# EAGLE board KäsiPCB v20 (EAGLE 9.7.0)
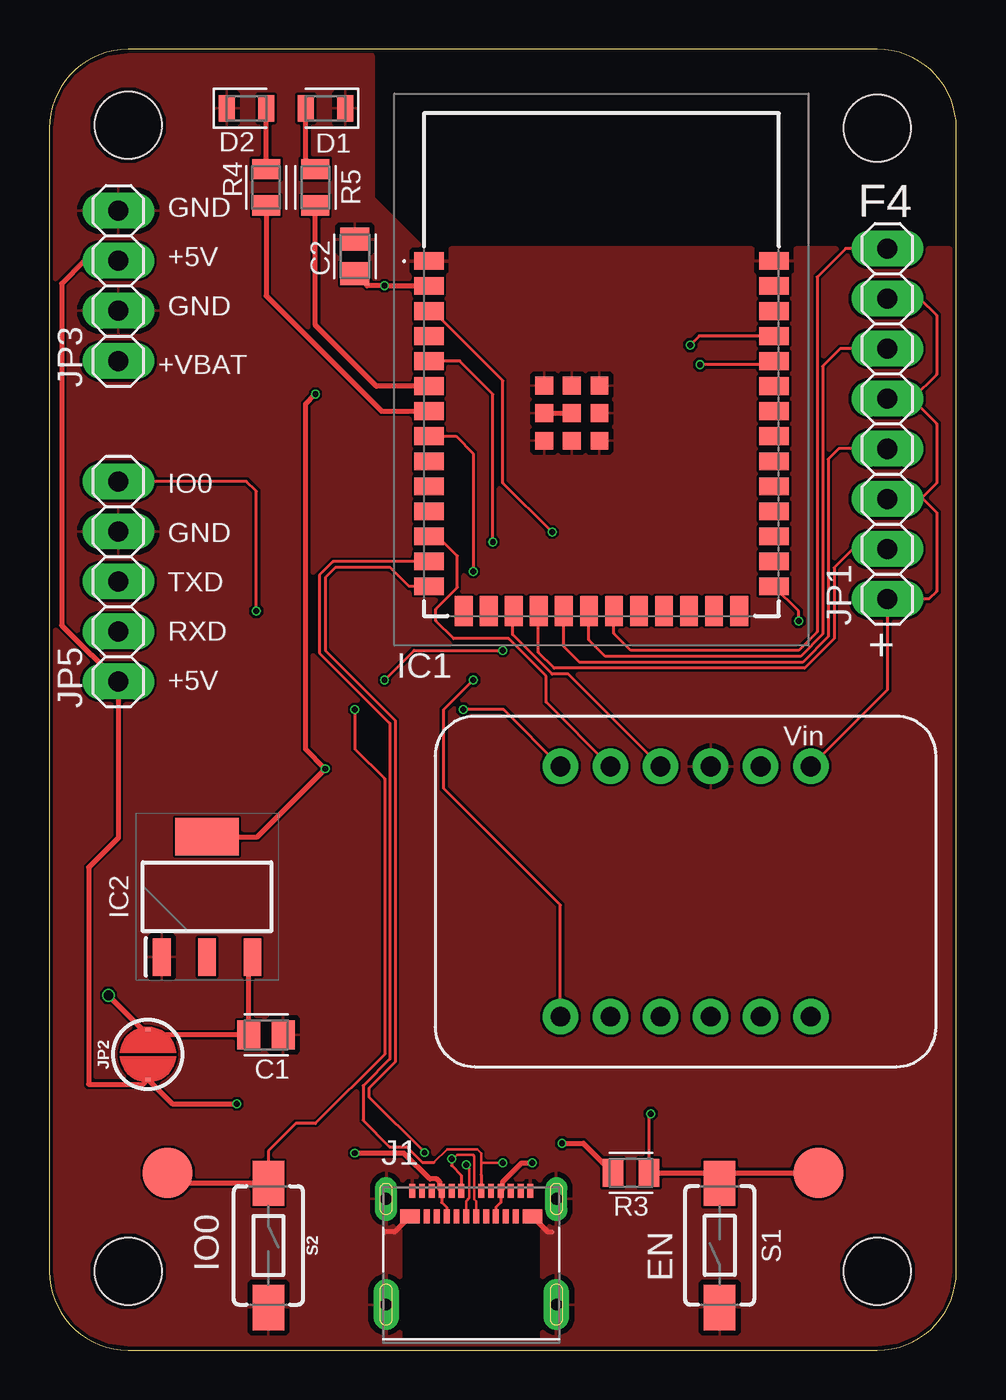
[diagram p0: board, top side]
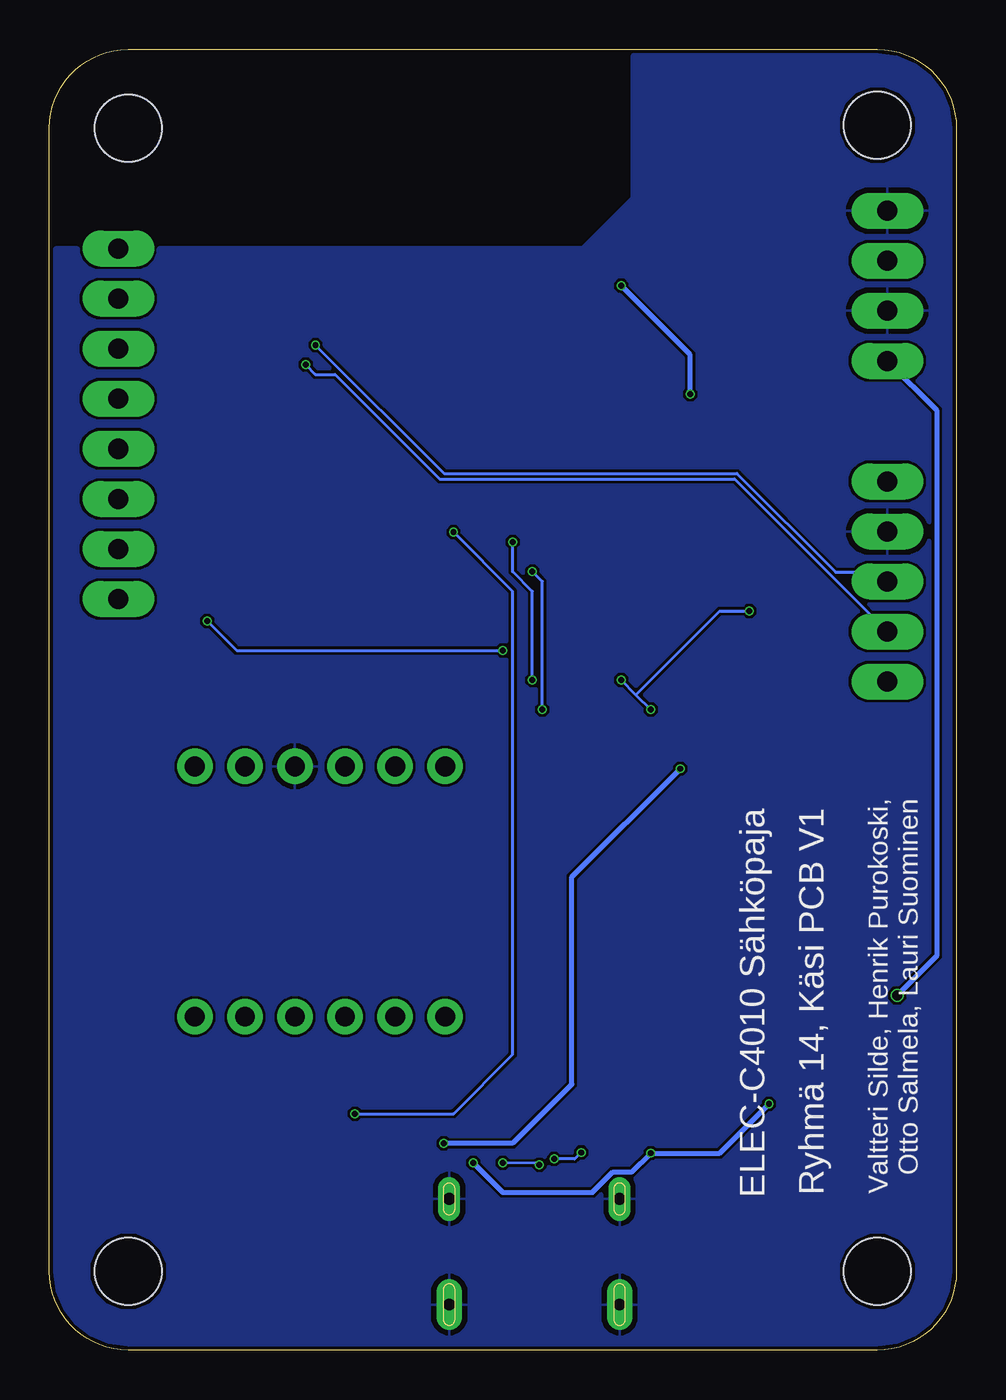
[diagram p1: board, bottom side, seen from below]

Size 46 x 66 mm. Coordinates in mm from the lower left corner, seen from the top.
Outline: 42,66 4,66 arc90 0,62 0,4 arc90 4,0 42,0 arc90 46,4 46,62 arc90 42,66
Copper layers (1*16): Top / Bottom
Stack-up Default Layer Stack: Top User Defined 0.035mm / Dielectric-1 User Defined 1.6mm / Bottom User Defined 0.035mm
Design rules: minimum copper width 5mil, minimum drill size 0.3mm, copper clearance wire_polygon to wire_polygon 5mil, copper clearance wire_polygon to pad_smd 5mil, copper clearance wire_polygon to via 5mil, copper clearance pad_smd to pad_smd 5mil, copper clearance pad_smd to via 5mil, copper clearance via to via 5mil, copper clearance smd to pad (same net) 5mil, copper clearance smd to via (same net) 5mil, copper clearance smd to smd (same net) 5mil, dimension clearance 0.2mm, restrict clearance 0mil, drill distance 6mil, keepout clearance 0mil
Holes 3.4 mm at 42,4 4,4 4,62.15 42,62

## Footprints (pad centres in the part's own frame; a part is rotated, then mirrored left to right if it is on the bottom)
ICM20948_BREADBOARD = drill 1 pad 1.676: P$1 -7.62,5.08; P$2 -5.08,5.08; P$3 -2.54,5.08; P$4 0,5.08; P$5 2.54,5.08; P$6 5.08,5.08; P$7 -7.62,-7.62; P$8 -5.08,-7.62; P$9 -2.54,-7.62; P$10 0,-7.62; P$11 2.54,-7.62; P$12 5.08,-7.62
CAPC2012X110 = smd 1.165 x 1.465: 1 -0.875,0; 2 0.875,0
LEDC2012X110N_B = smd 0.817 x 1.352: 1 -1,0 | smd 0.822 x 1.352: 2 0.998,0
LEDC2012X110N_R = smd 0.817 x 1.352: 1 -1,0 | smd 0.822 x 1.352: 2 0.998,0
ESP32S3WROOM1N16R2 = smd 1.5 x 0.9: 1 -8.75,5.26; 2 -8.75,3.99; 3 -8.75,2.72; 4 -8.75,1.45; 5 -8.75,0.18; 6 -8.75,-1.09; 7 -8.75,-2.36; 8 -8.75,-3.63; 9 -8.75,-4.9; 10 -8.75,-6.17; 11 -8.75,-7.44; 12 -8.75,-8.71; 13 -8.75,-9.98; 14 -8.75,-11.25; 27 8.75,-11.25; 28 8.75,-9.98; 29 8.75,-8.71; 30 8.75,-7.44; 31 8.75,-6.17; 32 8.75,-4.9; 33 8.75,-3.63; 34 8.75,-2.36; 35 8.75,-1.09; 36 8.75,0.18; 37 8.75,1.45; 38 8.75,2.72; 39 8.75,3.99; 40 8.75,5.26 | smd 0.9 x 1.5: 15 -6.985,-12.5; 16 -5.715,-12.5; 17 -4.445,-12.5; 18 -3.175,-12.5; 19 -1.905,-12.5; 20 -0.635,-12.5; 21 0.635,-12.5; 22 1.905,-12.5; 23 3.175,-12.5; 24 4.445,-12.5; 25 5.715,-12.5; 26 6.985,-12.5 | smd 0.9 x 0.9: 41 -1.5,-2.46; 42 -1.5,-1.06; 43 -2.9,-1.06; 44 -2.9,-2.46; 45 -2.9,-3.86; 46 -1.5,-3.86; 47 -0.1,-3.86; 48 -0.1,-2.46; 49 -0.1,-1.06
SOT230P700X180-4N = smd 1.9 x 0.9: 1 -3.05,2.3; 2 -3.05,0; 3 -3.05,-2.3 | smd 1.9 x 3.2: 4 3.05,0
MOLEX_105450-0101 = smd 0.3 x 0.7: A1 -3,3.77; A2 -2.5,3.77; A3 -2,3.77; A4 -1.5,3.77; A5 -1,3.77; A6 -0.5,3.77; A7 0.5,3.77; A8 1,3.77; A9 1.5,3.77; A10 2,3.77; A11 2.5,3.77; A12 3,3.77; B2 2.25,2.47; B3 1.75,2.47; B4 1.25,2.47; B5 0.75,2.47; B6 0.25,2.47; B7 -0.25,2.47; B8 -0.75,2.47; B9 -1.25,2.47; B10 -1.75,2.47; B11 -2.25,2.47 | smd 1 x 0.7: B1 3.1,2.47; B12 -3.1,2.47 | drill 0.6 pad 1.1 long: S1 -4.32,3.36; S2 4.32,3.36 | drill 0.6 pad 1.3 long: S3 -4.32,-2; S4 4.32,-2
1X08 = drill 1.016 long: 1 -8.89,0; 2 -6.35,0; 3 -3.81,0; 4 -1.27,0; 5 1.27,0; 6 3.81,0; 7 6.35,0; 8 8.89,0
SMT-JUMPER_2_NO_SILK_ROUND = smd 0.152 x 0.305: 1 -1.27,0; 2 1.27,0
1X04 = drill 1.016 long: 1 -3.81,0; 2 -1.27,0; 3 1.27,0; 4 3.81,0
1X05 = drill 1.016 long: 1 -5.08,0; 2 -2.54,0; 3 0,0; 4 2.54,0; 5 5.08,0
RESC2012X65 = smd 1.031 x 1.42: 1 -0.919,0; 2 0.919,0
TACTILE_SWITCH_SMD_6.0X3.5MM = smd 2.3 x 1.6: 1 -3.15,0; 2 3.15,0
B2,54 = smd 2.54 x 2.54: TP 0,0

## Placement (x,y rotation side)
A1  ICM20948  [ICM20948_BREADBOARD]  31,22 180 top
C1  [CAPC2012X110]  11,16 0 top
C2  [CAPC2012X110]  15.5,55.5 90 top
D1  LED_BLUE  [LEDC2012X110N_B]  14,63 180 top
D2  LED_RED  [LEDC2012X110N_R]  10,63 0 top
IC1  ESP32-S3-WROOM-1-N16R2  [ESP32S3WROOM1N16R2]  28,50 0 top
IC2  AP2114H-3.3TRG1  [SOT230P700X180-4N]  8,23 90 top
J1  USB-C_105450-0101  [MOLEX_105450-0101]  21.4,4.32 0 top
JP1  PINHD-1X8  [1X08]  42.5,47 90 top
JP2  NO_BAT  [SMT-JUMPER_2_NO_SILK_ROUND]  5,15 90 top
JP3  PINHD-1X4  [1X04]  3.5,54 90 top
JP5  PINHD-1X5  [1X05]  3.5,39 90 top
R3  5.2k  [RESC2012X65]  29.5,9 180 top
R4  52  [RESC2012X65]  11,59 270 top
R5  30  [RESC2012X65]  13.5,59 270 top
S1  TS-1101  [TACTILE_SWITCH_SMD_6.0X3.5MM]  34,5.32 90 top
S2  TS-1101  [TACTILE_SWITCH_SMD_6.0X3.5MM]  11.11,5.32 270 top
TP1  TPB2,54  [B2,54]  39,9 0 top
TP2  TPB2,54  [B2,54]  6,9 0 top

## Library data of the parts
A1 = Sähköpaja kirjasto
C1 C2 = Capacitor; CATEGORY: Capacitor
D1 = Opto-Electronic; CATEGORY: Opto-Electronic; COLOR: Blue; SUB-CATEGORY: LED
D2 = Opto-Electronic; CATEGORY: Opto-Electronic; COLOR: Red; SUB-CATEGORY: LED
IC1 = SamacSys_Parts; DESCRIPTION: SMD MODULE, ESP32-S3R2 WITH 2 MB; HEIGHT: 3.25mm; MANUFACTURER_NAME: Espressif Systems; MANUFACTURER_PART_NUMBER: ESP32-S3-WROOM-1-N16R2; MOUSER_PART_NUMBER: 356-ESP32S3WRM1N16R2; MOUSER_PRICE-STOCK: https://www.mouser.co.uk/ProductDetail/Espressif-Systems/ESP32-S3-WROOM-1-N16R2?qs=Li%252BoUPsLEnvy1bxV65eH%2Fw%3D%3D
IC2 = SamacSys_Parts; DESCRIPTION: 1A 3.3V Low Noise LDO Regulator SOT223 DiodesZetex AP2114H-3.3TRG1, LDO Voltage Regulator, 1 (Min)A, 3.3 V +/-1.5%, 2.5 6 Vin, 3-Pin SOT-223; HEIGHT: 1.8mm; MANUFACTURER_NAME: Diodes Inc.; MANUFACTURER_PART_NUMBER: AP2114H-3.3TRG1; MOUSER_PART_NUMBER: 621-AP2114H-3.3TRG1; MOUSER_PRICE-STOCK: https://www.mouser.co.uk/ProductDetail/Diodes-Incorporated/AP2114H-3.3TRG1?qs=x6A8l6qLYDDSG%2FfwzcsOhw%3D%3D
J1 = Usb-Connectors; AVAILABILITY: In Stock; CHECK_PRICES: https://www.snapeda.com/parts/105450-0101/Molex/view-part/?ref=eda; DESCRIPTION: USB Shielded I/O Receptacle,Type C,Right Angle,Surface Mount,Gold over Nickel | Molex Incorporated 105450-0101; MF: Molex; MP: 105450-0101; PACKAGE: None; PRICE: None; PURCHASE-URL: https://www.snapeda.com/api/url_track_click_mouser/?unipart_id=547391&manufacturer=Molex&part_name=105450-0101&search_term=None; SNAPEDA_LINK: https://www.snapeda.com/parts/105450-0101/Molex/view-part/?ref=snap
JP1 = Connector; CATEGORY: Headers; DESCRIPTION: Header, Straight, 8 Position; MANUFACTURER: Generic; MPN: Generic; OPERATING_TEMPERATURE: Generic; PART_STATUS: Active; PITCH: 0.100" (2.54mm); ROHS_COMPLIANCE: Generic; SERIES: Generic; SUB-CATEGORY: Headers, Male Pins; TYPE: Board to Board or Cable, Unshrouded, Through Hole, Straight
JP2 = SparkFun-Jumpers
JP3 = Connector; CATEGORY: Headers; DESCRIPTION: Header, Straight, 4 Position; MANUFACTURER: Generic; MPN: Generic; OPERATING_TEMPERATURE: Generic; PART_STATUS: Active; PITCH: 0.100" (2.54mm); ROHS_COMPLIANCE: Generic; SERIES: Generic; SUB-CATEGORY: Headers, Male Pins; TYPE: Board to Board or Cable, Unshrouded, Through Hole, Straight
JP5 = Connector; CATEGORY: Headers; DESCRIPTION: Header, Straight, 5 Position; MANUFACTURER: Generic; MPN: Generic; OPERATING_TEMPERATURE: Generic; PART_STATUS: Active; PITCH: 0.100" (2.54mm); ROHS_COMPLIANCE: Generic; SERIES: Generic; SUB-CATEGORY: Headers, Male Pins; TYPE: Board to Board or Cable, Unshrouded, Through Hole, Straight
R3-R5 = Resistor; CATEGORY: Resistor; SUB-CATEGORY: Fixed
S1 S2 = SparkFun-Switches; PROD_ID: SWCH-14278; SF_SKU: COM-08229
TP1 TP2 = testpad

## Nets
1V8: A1.P$8
+3.3V: C2.1 IC1.2 IC2.4 R3.2
+3V3: A1.P$7 JP1.1 JP1.3 JP1.5 JP1.7
+5V: J1.A4 J1.A9 J1.B4 J1.B9 JP2.1 JP3.3 JP5.1
+VBAT: C1.1 IC2.3 JP2.2 JP3.1
BLUE_LED+: IC1.6 R5.2
CS: A1.P$6 IC1.5
D+: IC1.14 J1.A6 J1.B6
D-: IC1.13 J1.A7 J1.B7
FORCE_1: IC1.18 JP1.2
FORCE_2: IC1.19 JP1.4
FORCE_3: IC1.20 JP1.6
FORCE_4: IC1.21 JP1.8
GND: A1.P$9 C1.2 C2.2 D1.1 D2.1 IC1.1 IC1.40 IC1.41 IC1.42 IC1.43 IC1.44 IC1.45 IC1.46 IC1.47 IC1.48 IC1.49 IC2.1 J1.A1 J1.A12 J1.B1 J1.B12 J1.S1 J1.S2 J1.S3 J1.S4 JP3.2 JP3.4 JP5.4 S1.1 S2.2
GPIO0: IC1.27 JP5.5 S2.1 TP2.TP
INT: A1.P$12 IC1.8
N$3: IC1.3 R3.1 S1.2 TP1.TP
N$4: D2.2 R4.1
N$5: D1.2 R5.1
RED_LED+: IC1.7 R4.2
RXD: IC1.36 JP5.2
SCL: A1.P$10 IC1.17
SDA: A1.P$11 IC1.12
TXD: IC1.37 JP5.3

## Tracks (layer width: path | path; a pad name or v marks a point on that pad's centre or on a via)
+3.3V  (via drill 0.3)
  Top 0.254: IC2.4 10.55,26.05 v14,29.5 13,30.5 13,48 v13.5,48.5 | v26,10.5 27.08,10.5 R3.2 | IC1.2 v17,54 16.12,54 C2.1
  Bottom 0.254: v14,29.5 19.5,24 19.5,13.5 22.5,10.5 v26,10.5 | v13.5,48.5 13.5,50.5 v17,54
+3V3
  Top 0.15: JP1.7 44.15,53.35 45,52.5 45,49.5 43.77,48.27 JP1.5 43.73,48.27 45,47 45,44 44.19,43.19 JP1.3 44.31,43.19 45,42.5 45,38.5 44.61,38.11 JP1.1 42.5,33.5 A1.P$7
+5V  (via drill 0.3)
  Top 0.15: J1.A4 19.9,7.5 20.15,7.25 J1.B9 | J1.B4 22.65,7.25 22.9,7.5 J1.A9
  Top 0.254: JP3.3 1.77,55.27 0.62,54.12 0.62,36.77 2.1,35.29 2.13,35.29 JP5.1 3.5,26 2,24.5 2,13.5 4.77,13.5 JP2.1 6.23,12.5 v9.5,12.5 | v15.5,10 17.99,10 19.3,8.69 19.66,8.69 19.8,8.54 19.8,8.18 J1.A4 | J1.A9 23,8.18 23,8.54 23.95,9.5 v24.5,9.5
  Bottom 0.254: v9.5,12.5 12,10 v15.5,10 16.46,9.04 17.41,9.04 18.45,8 23,8 v24.5,9.5
+VBAT  (via drill 0.5)
  Top 0.254: IC2.3 10.12,19.77 C1.1 5.27,16 5.13,16.13 | 5.13,16.13 JP2.2 | v3,18 4.87,16.13 5.13,16.13
  Bottom 0.254: JP3.1 1,47.69 1,20 v3,18
BLUE_LED+
  Top 0.254: IC1.6 16.59,48.91 13.5,52 R5.2
CS  (via drill 0.3)
  Top 0.15: A1.P$6 25.92,22.58 20,28.5 20,32.5 v21.5,34 | v22.5,41 22.5,48.5 20.82,50.18 IC1.5
  Bottom 0.15: v21.5,34 21.5,38.5 22.5,39.5 v22.5,41
D+  (via drill 0.3)
  Top 0.127: J1.B6 21.65,7.57 21.56,7.66 21.56,9.84 21.5,9.9 20.7,9.9 20.4,9.6
  Top 0.15: IC1.14 18.25,38.75 17.3,39.7 14.5,39.7 14,39.2 14,35.5 17.55,31.95 17.55,14.63 16.21,13.29 16.21,12.84 v19.03,10.03 | v20.4,9.7 20.4,9.6 20.4,9.37 20.9,8.87 J1.A6
  Bottom 0.15: v19.03,10.03 19.36,9.7 v20.4,9.7
D-  (via drill 0.3)
  Top 0.127: J1.B7 21.15,7.57 21.3,7.72 21.3,9.24 v21.14,9.4 | 19.5,9.53 20.17,10.2 21.7,10.2 21.9,10 21.9,9.5 | 21.9,9.5 21.9,8.9 | v23,9.5 21.9,9.5
  Top 0.15: IC1.13 19.23,40 14.38,40 13.7,39.32 13.7,35.38 17.28,31.8 17.28,14.78 16,13.5 | 16,13.5 | 16,13.5 15.91,13.41 15.91,11.66 17.25,10.33 18.12,10.33 18.92,9.53 19.5,9.53 | 21.9,8.9 J1.A7
  Bottom 0.127: v23,9.5 21.3,9.5 21.2,9.4 v21.14,9.4
FORCE_1
  Top 0.15: JP1.2 40.75,40.65 39.8,39.7 39.8,36.1 38.3,34.6 25.6,34.6 24.8,35.4 24.8,37.47 IC1.18
FORCE_2
  Top 0.15: JP1.4 40.03,45.73 39.5,45.2 39.5,36.2 38.2,34.9 26.9,34.9 26.09,35.7 IC1.19
FORCE_3
  Top 0.15: JP1.6 40.11,50.81 39.22,49.92 39.22,36.32 38.1,35.2 28.2,35.2 27.36,36.03 IC1.20
FORCE_4
  Top 0.15: JP1.8 40.39,55.89 38.95,54.45 38.95,36.45 38,35.5 29.5,35.5 28.64,36.36 IC1.21
GND
  Top 0.254: J1.B12 17.51,6 17,6 | J1.B1 25.29,6 25.5,6 | IC1.44 IC1.41
  pour Top: 9.5,75.5 1,67 -2,67 -4,65 -4,0 0.5,-4.5 45,-4.5 51.5,2 51.5,53 48.5,56 19,56 16.5,58.5 16.5,68.5
  pour Bottom: 14,69.5 2.5,69.5 -6.5,60.5 -6.5,7.5 7.5,-6.5 39,-6.5 53.5,8 53.5,51 48.5,56 19,56 16.5,58.5 16.5,67
GPIO0  (via drill 0.3)
  Top 0.15: v23,35.5 18.5,35.5 v17,34 | v15.5,32.5 15.5,30.5 17,29 17,15 13.5,11.5 12.5,11.5 11.11,10.11 S2.1 | v10.5,37.5 10.5,43.58 10,44.08 JP5.5 | IC1.27 38,37.5 v38,37
  Top 0.254: S2.1 6.53,8.47 TP2.TP
  Bottom 0.15: 16.25,33.25 v17,34 | 16.25,33.25 v15.5,32.5 | 16.25,33.25 12,37.5 v10.5,37.5 | v38,37 36.5,35.5 v23,35.5
INT  (via drill 0.3)
  Top 0.15: A1.P$12 23.04,32.5 v21,32.5 | v21.5,39.5 21.5,45.5 20.63,46.37 IC1.8
  Bottom 0.15: v21.5,39.5 21,39 v21,32.5
N$3  (via drill 0.3)
  Top 0.15: R3.1 30.42,11.92 v30.5,12 | v25.5,41.5 23,44 23,49.19 19.47,52.72 IC1.3
  Top 0.254: R3.1 33.47,9 S1.2 34.53,9 TP1.TP
  Bottom 0.15: v30.5,12 25.5,12 22.5,15 22.5,38.5 v25.5,41.5
N$4
  Top 0.254: R4.1 D2.2
N$5
  Top 0.254: R5.1 13,60.42 D1.2
RED_LED+
  Top 0.254: R4.2 11,53.5 16.86,47.64 IC1.7
RXD  (via drill 0.3)
  Top 0.15: IC1.36 36.57,50 v33,50
  Bottom 0.15: v33,50 32.5,49.5 31.5,49.5 26.2,44.2 11.24,44.2 JP5.2
SCL
  Top 0.15: A1.P$10 26.32,34.3 25.5,34.3 23.5,36.3 23.5,37.44 IC1.17
SDA
  Top 0.15: A1.P$11 25.2,32.88 25.2,34.2 23.3,36.1 20.5,36.1 19.6,37 19.6,37.6 20.7,38.7 20.7,40.3 19.71,41.29 IC1.12
TXD  (via drill 0.3)
  Top 0.15: IC1.37 32.95,51.45 v32.5,51
  Bottom 0.15: v32.5,51 25.98,44.48 11.12,44.48 6.12,39.48 3.98,39.48 JP5.3

## Text on the board
tPlace: GND | F4 | +5V | GND | +VBAT | IO0 | GND | TXD | RXD | + | +5V | IO0 | EN
bPlace: Valtteri Silde, Henrik Purokoski, / Otto Salmela, Lauri Suominen | Ryhmä 14, Käsi PCB V1 | ELEC-C4010 Sähköpaja